# Altium PCB f1_bd_1.PcbDoc
Units mm, origin at the board's own origin, x right, y up, seen from the top; angles counter-clockwise.
Board outline 152.4 x 101.6 mm, 2 copper layers (Top Layer, Bottom Layer); 5 components, 39 nets, 44 pads, 0 vias.
Unrouted connection lines stored in the file: 1.
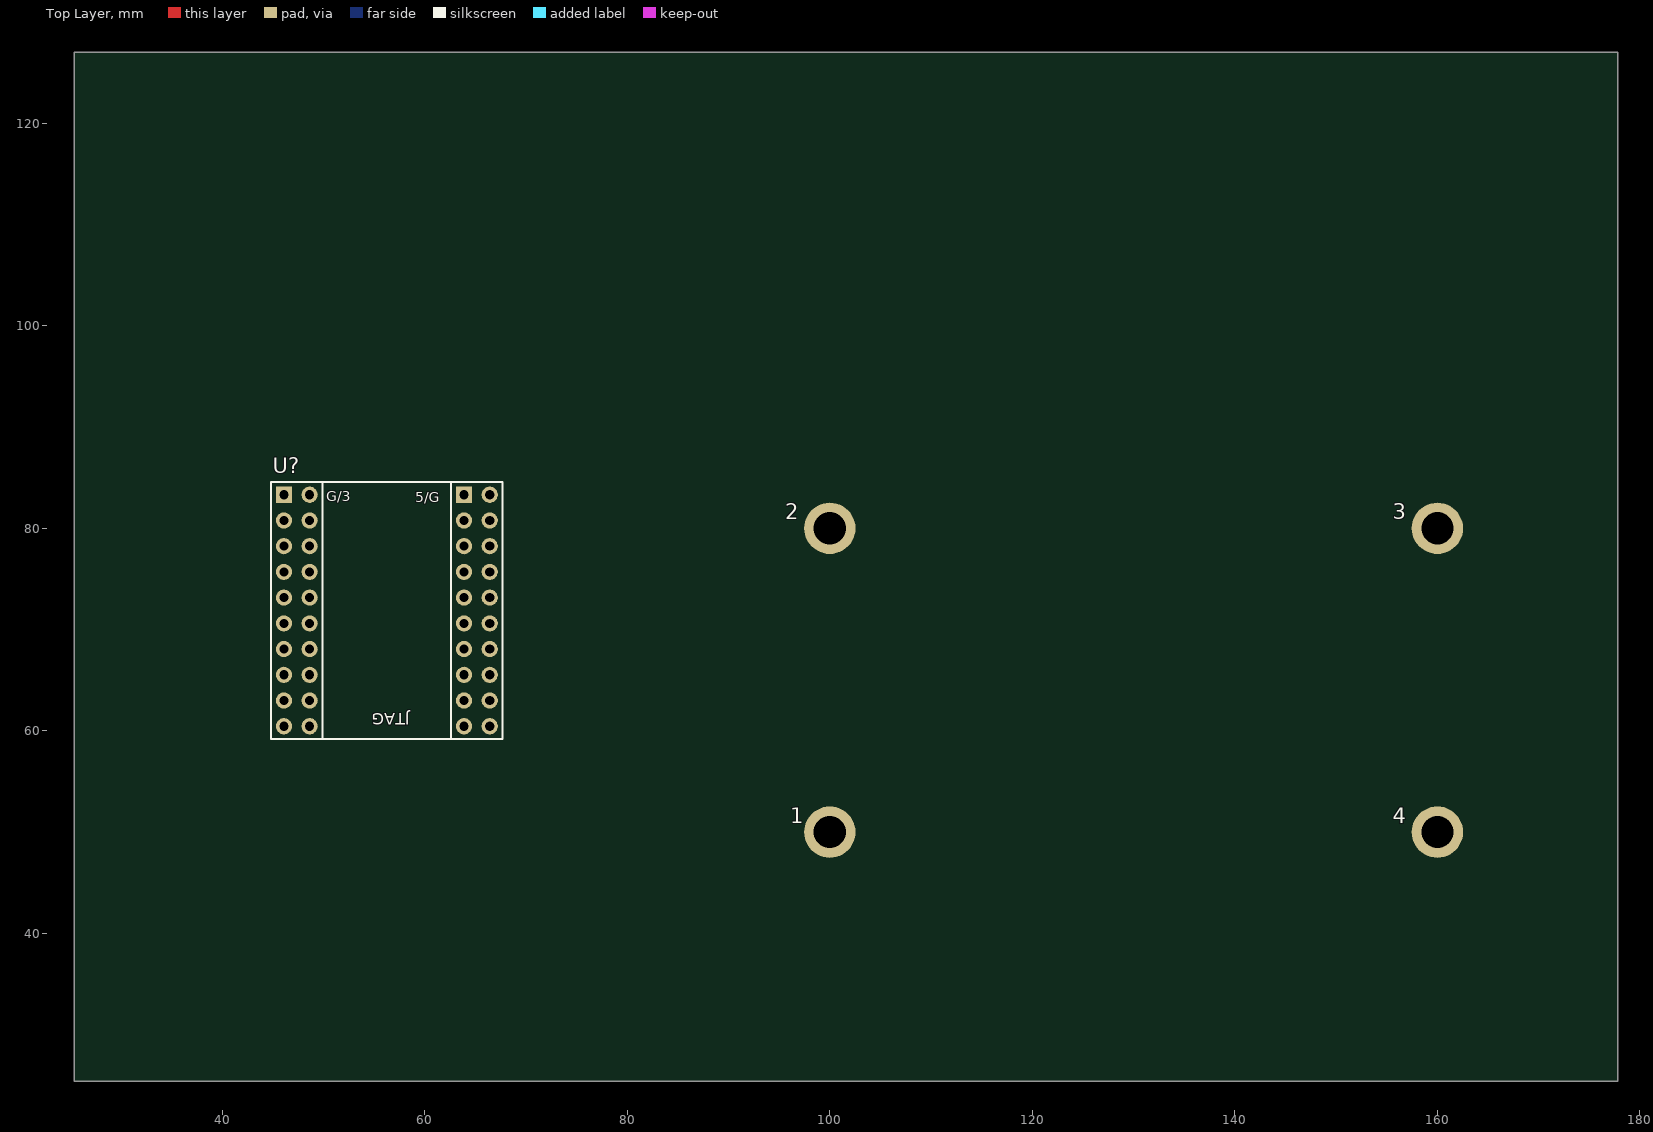
[diagram p0: Top Layer view]
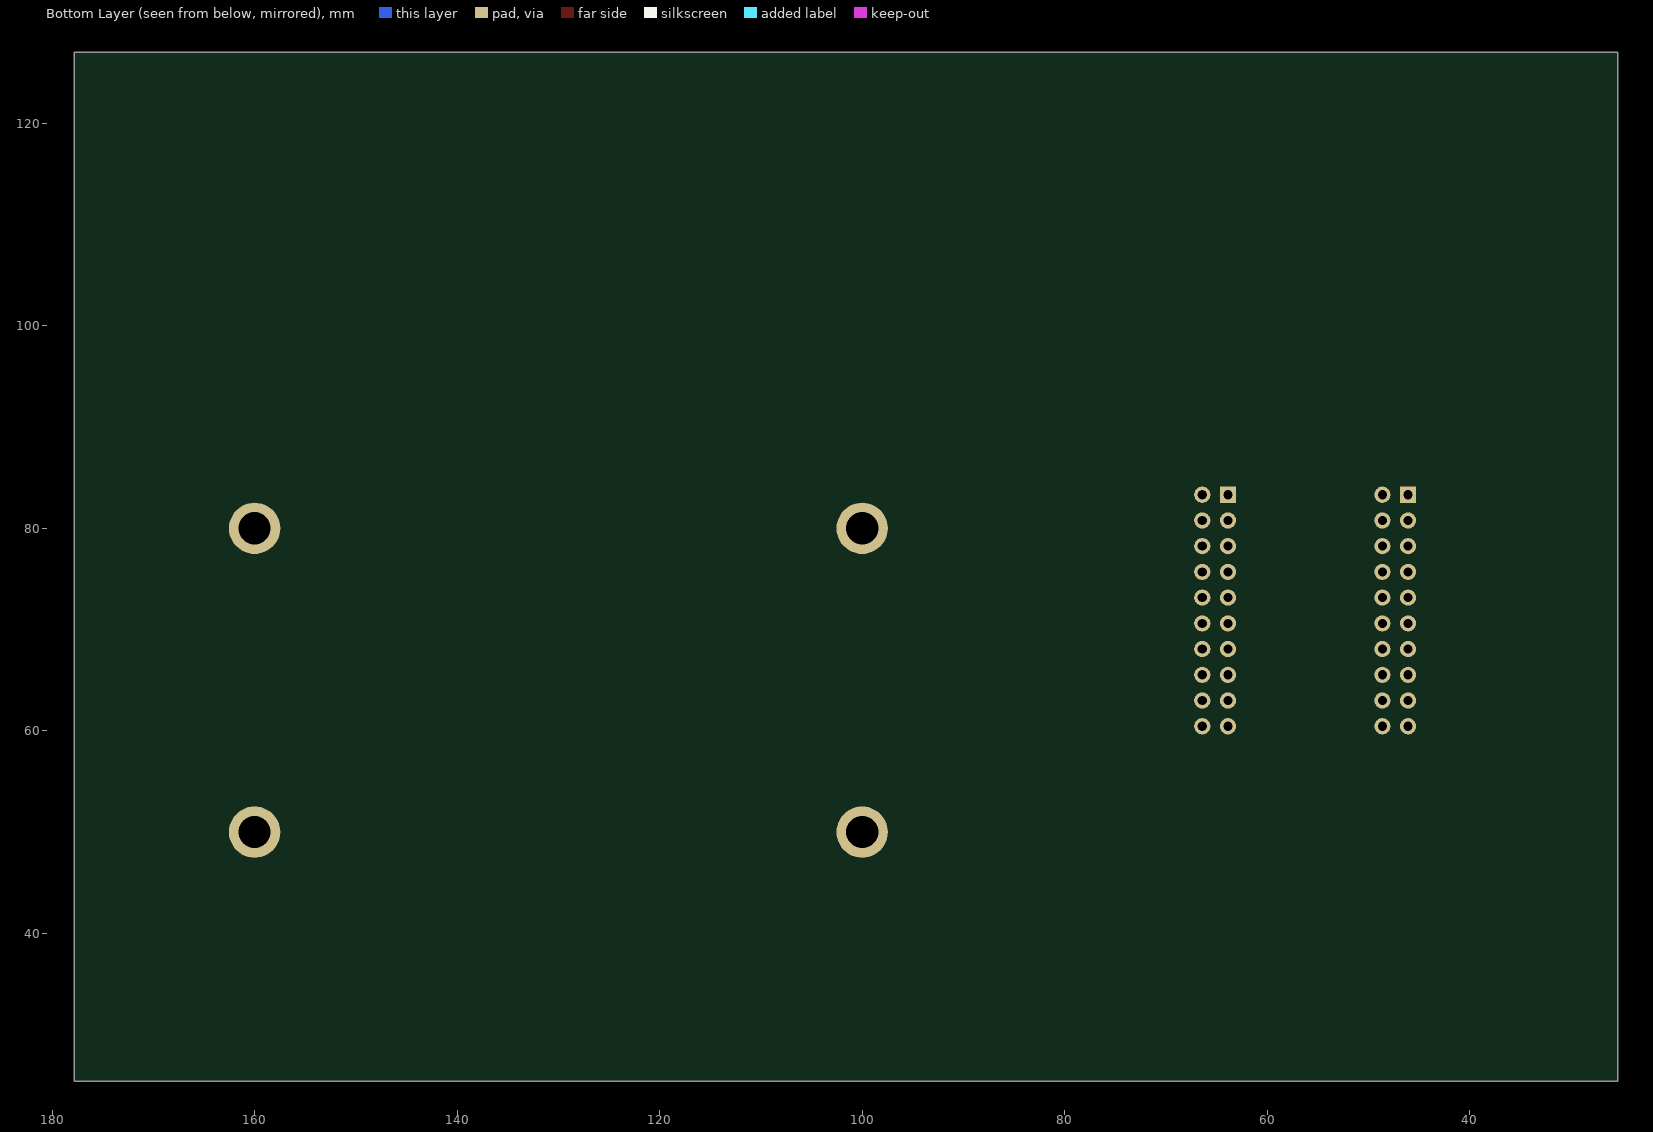
[diagram p1: Bottom Layer view, seen from below]

## Layer stack, top to bottom
Top Solder: solder mask 0.0102, Solder Resist, Dk 3.5
Top Layer: signal copper 0.0356
Dielectric 1: dielectric 0.32, FR-4, Dk 4.8
Bottom Layer: signal copper 0.0356
Bottom Solder: solder mask 0.0102, Solder Resist, Dk 3.5

## Board outline
25.4,25.4 177.8,25.4 177.8,127 25.4,127

## Design rules (kind name [scope] priority, off if disabled: settings)
Clearance [All] p1: gap=0.254 ignorepadtopadclearanceinfootprint=FALSE
PolygonConnect [All] p1: connectstyle=Relief reliefconductorwidth=0.254 reliefentries=4 polygonreliefangle="90 Angle" airgapwidth=0.254
RoutingVias [All] p1: holewidth=0.711 width=1.27 viastyle="Through Hole" minholewidth=0.711 minwidth=1.27 maxholewidth=0.711 maxwidth=1.27
SolderMaskExpansion [All] p1: expansion=0.102 istentingtop=FALSE
SupplyNets "Schematic Supply Nets_2" [InNet('3V3')] p1: voltage=0.000
SupplyNets "Schematic Supply Nets_1" [InNet('5V')] p2: voltage=0.000
SupplyNets "Schematic Supply Nets" [InNet('GND')] p3: voltage=0.000
Width [All] p1: maxlimit=0.254 minlimit=0.254 preferedwidth=0.254
30 further rules are at their usual default settings.

## Components (designator, comment, footprint, x,y, rotation, side; value= is the part's Value field where it differs from the comment)
1 "M3" "M3 125X200" 100,50 r90 top locked
2 "M3" "M3 125X200" 100,80 r90 top locked
3 "M3" "M3 125X200" 160,80 r90 top locked
4 "M3" "M3 125X200" 160,50 r90 top locked
U? "f1_hw_1_gw" F1_HW_1_GW 56.007,71.501 r90 top

## Footprints (in the part's own frame and the unit in brackets; to place one, negate y for a bottom-side part, rotate by r counter-clockwise, add the part's x,y. Pads: shape width x height; smd on the part's side, far side on the other; paste and mask are expansions set on the pad)
F1_HW_1_GW [mm]
  rect 1.6x1.6 hole 0.9: 1(11.811,9.906) 21(11.811,-7.874)
  round 1.6 hole 0.9: 2(11.811,7.366) 3(9.271,9.906) 4(9.271,7.366) 5(6.731,9.906) 6(6.731,7.366) 7(4.191,9.906) 8(4.191,7.366) 9(1.651,9.906) 10(1.651,7.366) 11(-0.889,9.906) 12(-0.889,7.366) 13(-3.429,9.906) 14(-3.429,7.366) 15(-5.969,9.906) 16(-5.969,7.366) 17(-8.509,9.906) 18(-8.509,7.366) 19(-11.049,9.906) 20(-11.049,7.366) 22(11.811,-10.414) 23(9.271,-7.874) 24(9.271,-10.414) 25(6.731,-7.874) 26(6.731,-10.414) 27(4.191,-7.874) 28(4.191,-10.414) 29(1.651,-7.874) 30(1.651,-10.414) 31(-0.889,-7.874) 32(-0.889,-10.414) 33(-3.429,-7.874) 34(-3.429,-10.414) 35(-5.969,-7.874) 36(-5.969,-10.414) 37(-8.509,-7.874) 38(-8.509,-10.414) 39(-11.049,-7.874) 40(-11.049,-10.414)
  silkscreen extent -12.32,-11.68 13.08,11.18, body extent -12.38,-11.68 13.08,11.18, height 8.5
"M3 125X200" [mm] "M3螺丝孔，孔125Mil，焊盘200Mil"
  round 5.08 hole 3.175: 1(0,0)

## Part data
1 2 3 4: library part prot_m3, "m3铜柱孔", BOM名称=铜柱孔, 学习资源=www.ooocke.com, 版权归属=源创客

## Nets (pads, with @x,y where several pads share a name; then routed paths per layer and width w, separated by ;. In a path a pad name is that pad's centre, name@x,y a point inside that pad or via, vN(x,y) a via of type N, cw(c..) or ccw(c..) an arc to the next point about the centre after c; other vN are vias at no path point)
3V3: U?.2
5V: U?.21
BOOT0: U?.35
GND: U?.1 U?.22
NRST: U?.12
PA0: U?.20
PA1: U?.19
PA2: U?.18
PA3: U?.17
PA4: U?.16
PA5: U?.15
PA6: U?.14
PA7: U?.13
PA8: U?.23
PA9: U?.24
PA10: U?.25
PA11: U?.26
PA12: U?.27
PA13: U?.28
PA14: U?.29
PA15: U?.30
PB0: U?.11
PB1: U?.9
PB2: U?.10
PB3: U?.32
PB4: U?.31
PB5: U?.34
PB6: U?.33
PB7: U?.36
PB8: U?.38
PB9: U?.37
PB10: U?.7
PB11: U?.8
PB12: U?.5
PB13: U?.6
PB14: U?.3
PB15: U?.4
PC13: U?.39
VBAT: U?.40
pads on no net: 1.1 2.1 3.1 4.1

## Text inside footprints (layer, text, board x,y; h text height)
U?: Top Overlay "JTAG" at 58.547,61.722 h1.14 r180; Top Overlay "G/3" at 50.292,82.677 h1; Top Overlay "5/G" at 59.055,82.55 h1